# Altium PCB RFID_PCB_Antenna.PcbDoc
Units mm, origin at the board's own origin, x right, y up, seen from the top; angles counter-clockwise.
Board outline 45.7 x 47.45 mm, 2 copper layers (Top Layer, Bottom Layer), stack 1.58 mm thick; 65 components, 38 nets, 190 pads, 57 vias.
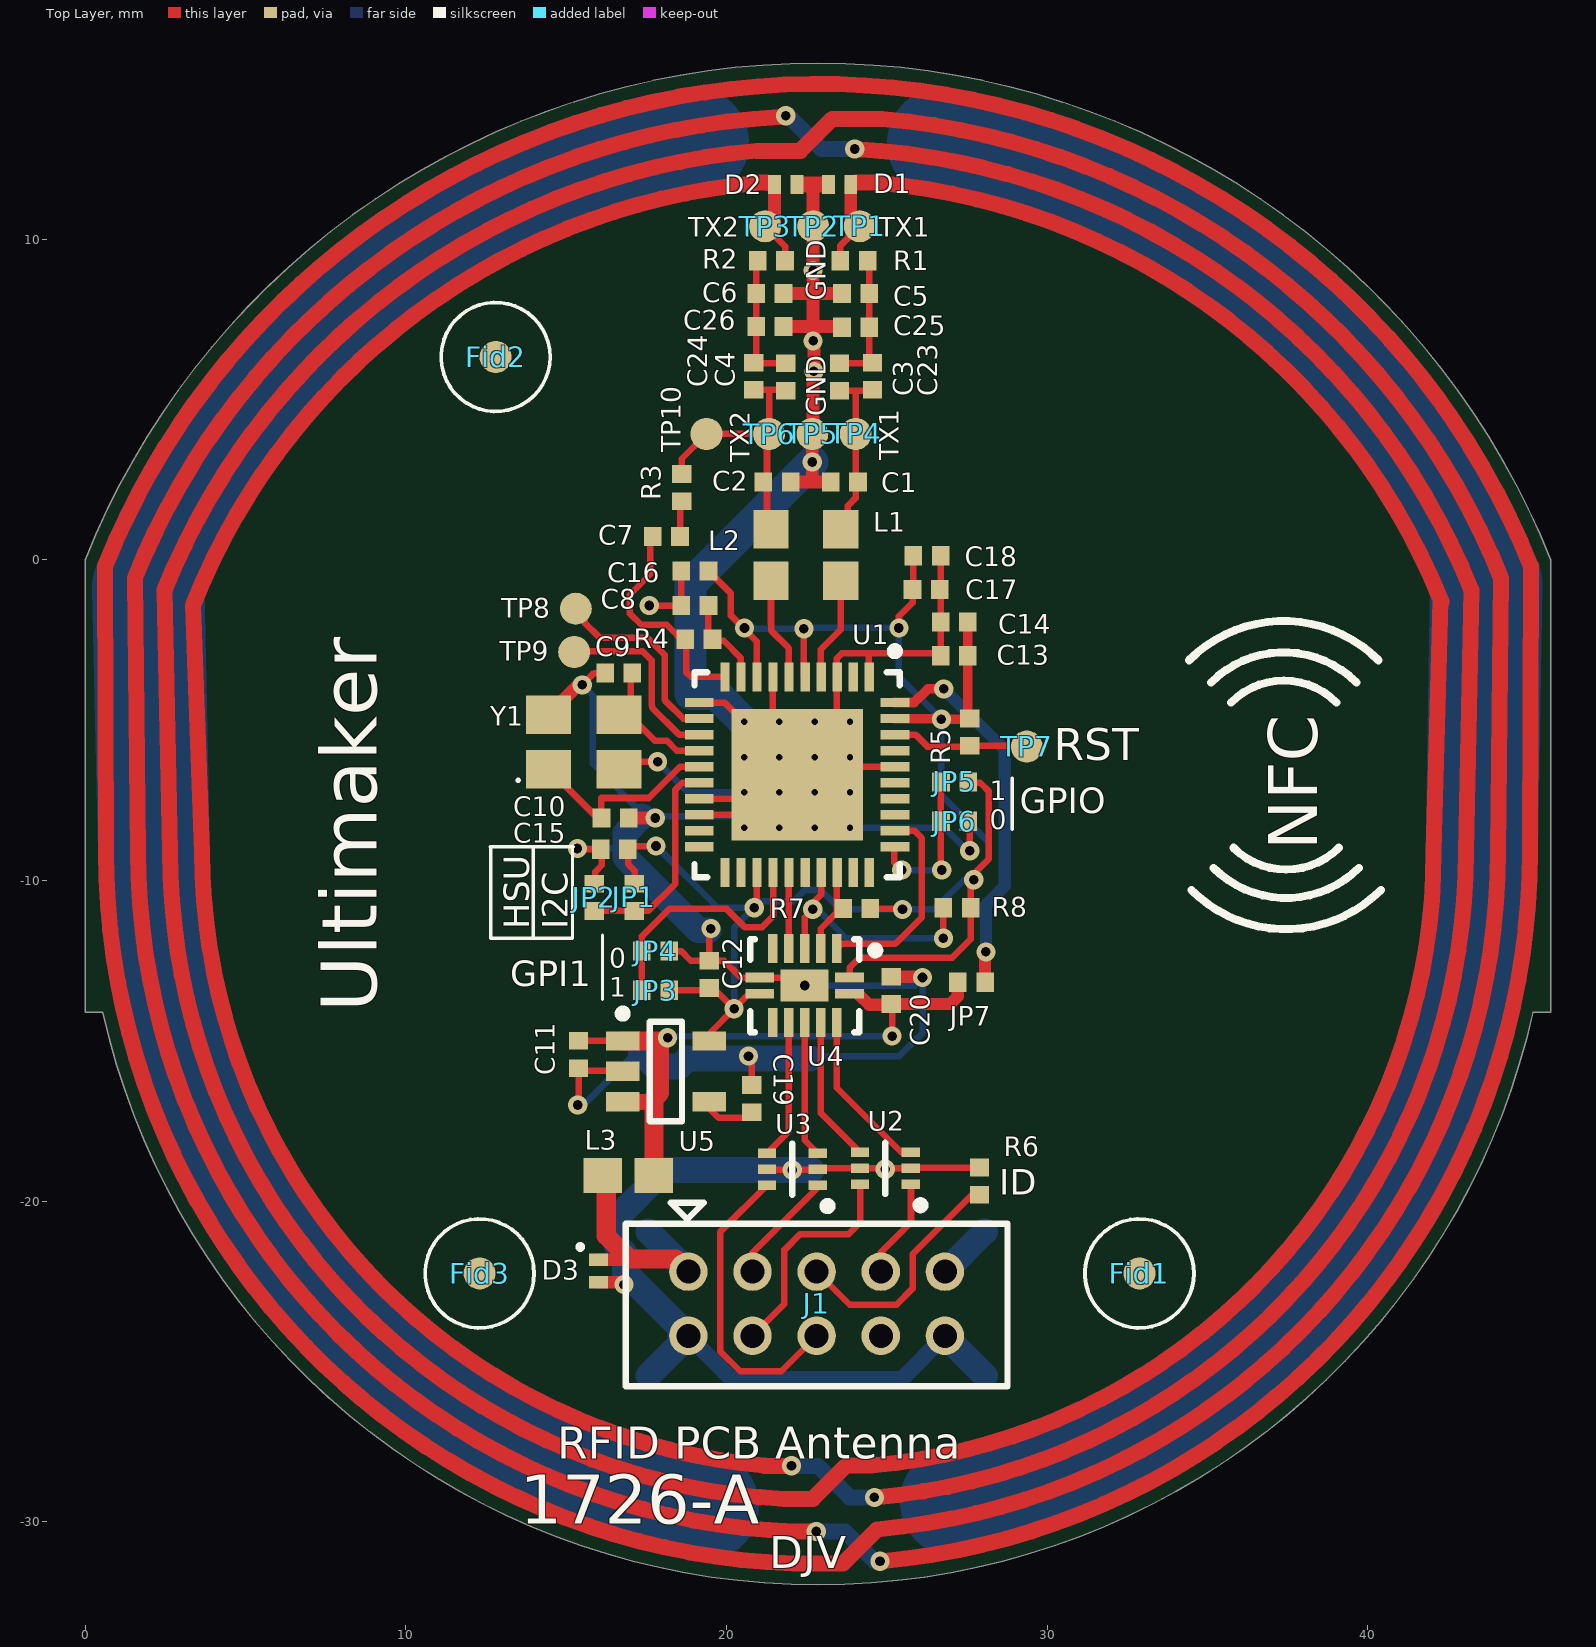
[diagram p0: Top Layer view]
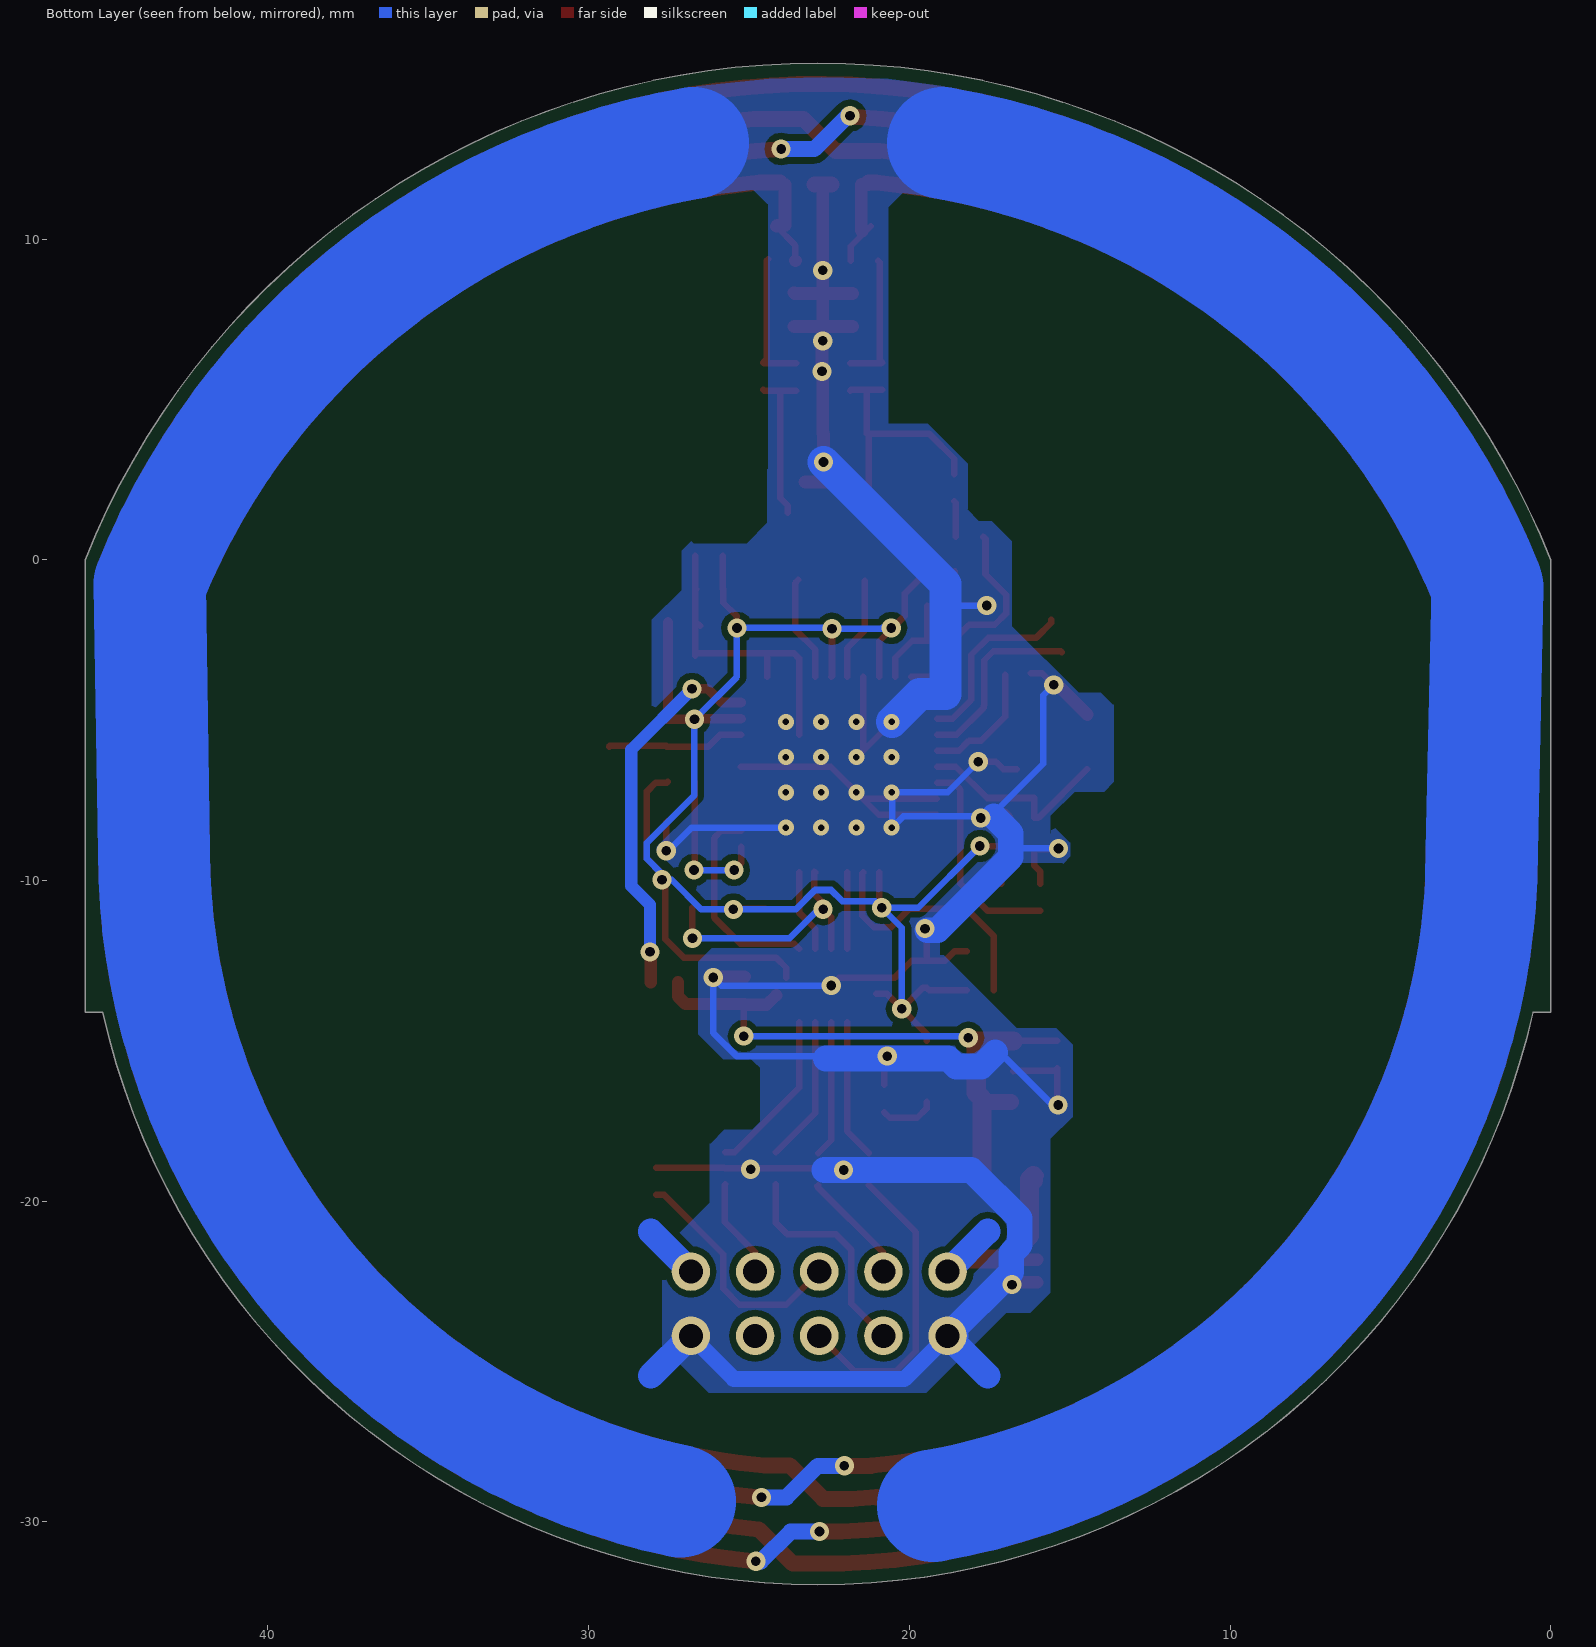
[diagram p1: Bottom Layer view, seen from below]

## Layer stack, top to bottom
Top Solder: solder mask 0.0102, Solder Resist, Dk 3.5
Top Layer: signal copper 0.0356
Dielectric 1: dielectric 1.5086, FR-4, Dk 4.8
Bottom Layer: signal copper 0.0356
Bottom Solder: solder mask 0.0102, Solder Resist, Dk 3.5

## Board outline
0,-14.112 0,0 cw(c22.85,-9.112) 45.7,0 45.7,-14.112 45.146,-14.112 cw(c22.85,-9.112) 0.554,-14.112

## Design rules (kind name [scope] priority, off if disabled: settings)
Clearance Clearance_Board_Outline [InPolygon vs OnLayer('Keep-Out Layer')] p1: gap=0.4 ignorepadtopadclearanceinfootprint=FALSE except(0: Arc-Hole Track-Hole SMDPad-Hole THPad-Hole Via-Hole Fill-Hole Poly-Hole Region-Hole Text-Hole)
Clearance Clearance_U1 [InComponent('U1')] p2: gap=0.178 ignorepadtopadclearanceinfootprint=FALSE except(0: Arc-Hole Track-Hole SMDPad-Hole THPad-Hole Via-Hole Fill-Hole Poly-Hole Region-Hole Text-Hole)
Clearance Clearance_U6 [InComponent('U6')] p3: gap=0.178 ignorepadtopadclearanceinfootprint=FALSE except(0: Arc-Hole Track-Hole SMDPad-Hole THPad-Hole Via-Hole Fill-Hole Poly-Hole Region-Hole Text-Hole)
Clearance Clearance_U3,4,5 [InComponent('U3') or InComponent('U4') or InComponent('U5') or InComponent('U14') or InComponent('U16')] p4: gap=0.178 ignorepadtopadclearanceinfootprint=FALSE except(0: Arc-Hole Track-Hole SMDPad-Hole THPad-Hole Via-Hole Fill-Hole Poly-Hole Region-Hole Text-Hole)
Clearance [All] p5: gap=0.2 ignorepadtopadclearanceinfootprint=FALSE except(0: Arc-Hole Track-Hole SMDPad-Hole THPad-Hole Via-Hole Fill-Hole Poly-Hole Region-Hole Text-Hole)
HoleSize [All] p1: absolutevalues=TRUE maxlimit=4.3 minlimit=0.025 maxpercent=80.000 minpercent=20.000
MinimumSolderMaskSliver [All] p1 off: minsoldermaskwidth=0.051
NetAntennae NetAntennae_GND [InNet('GND')] p1: netantennaetolerance=100
NetAntennae NetAntennae_TX2 [InNet('TX2')] p2: netantennaetolerance=275
NetAntennae NetAntennae_TX1 [InNet('TX1')] p3: netantennaetolerance=275
PlaneClearance [All] p1: clearance=0.203
PlaneConnect [All] p1: planeconnectstyle=Relief reliefexpansion=0.203 reliefentries=4 reliefconductorwidth=0.203 reliefairgap=0.203
PolygonConnect Via [All vs IsVia] p1: connectstyle=Direct reliefconductorwidth=0.254 reliefentries=4 polygonreliefangle="90 Angle" airgapwidth=0.254
PolygonConnect [All] p2: connectstyle=Direct reliefconductorwidth=0.254 reliefentries=4 polygonreliefangle="90 Angle" airgapwidth=0.254
RoomDefinition RFID_PCB_Antenna_1726-A_part_2 [InComponentClass('RFID_PCB_Antenna_1726-A_part_2')] p1 off: confinementstyle=ConfineIn formatcopy=TRUE lockcomponents=FALSE outline 70,13.575 87.35,13.575 87.35,18.15 70,18.15
RoutingVias [All] p1: holewidth=0.3 width=0.6 viastyle="Through Hole" minholewidth=0.3 minwidth=0.6 maxholewidth=1 maxwidth=3
ShortCircuit ShortCircuit_TX1 [InNet('TX1') vs InNet('GND')] p1: allowed=TRUE
ShortCircuit ShortCircuit_TX [InNet('TX1') vs InNet('TX2')] p2: allowed=TRUE
ShortCircuit ShortCircuit_TX2 [InNet('TX2') vs InNet('GND')] p3: allowed=TRUE
SilkToSilkClearance [All] p1: silktosilkclearance=0
SilkToSolderMaskClearance SilkscreenOverComponentPads [IsPad] p1: minsilkscreentomaskgap=0.127 clearancetoexposedcopper=TRUE
SolderMaskExpansion [All] p1: expansion=0.102
Width [All] p1: maxlimit=10 minlimit=0.203 preferedwidth=0.203
22 further rules are at their usual default settings.

## Classes and differential pairs
component class RFID_PCB_Antenna_1726-A_part_1: C1 C2 C3 C4 C5 C6 C7 C8 C9 C10 C23 C24 C25 C26 D1 D2 JP1 JP2 JP3 JP4 JP5 JP6 L1 L2 R1 R2 R3 R4 R5 TP1 TP2 TP3 TP4 TP5 TP6 TP7 TP8 TP9 TP10 U1 Y1
component class RFID_PCB_Antenna_1726-A_part_2: C11 C12 C13 C14 C15 C16 C17 C18 C19 C20 D3 Fid1 Fid2 Fid3 J1 JP7 L3 R6 R7 R8 U2 U3 U4 U5

## Components (designator, comment, footprint, x,y, rotation, side; value= is the part's Value field where it differs from the comment)
C1 "220pF" cap0402 23.675,2.425 r0 top
C2 "220pF" cap0402 21.575,2.425 r0 top
C3 "TBD" cap0402 23.525,5.7 r90 top
C4 "TBD" cap0402 21.85,5.7 r90 top
C5 "TBD" cap0402 24.025,8.3 r0 top
C6 "TBD" cap0402 21.35,8.3 r0 top
C7 "1nF" cap0402 18.125,0.725 r0 top
C8 "100nF" cap0402 19.012,-1.425 r0 top
C9 "33pF" cap0402 16.639,-3.532 r0 top
C10 "33pF" cap0402 16.525,-8.05 r180 top
C11 "100nF" cap0402 15.387,-15.425 r90 top
C12 "2.2uF" cap0402 19.462,-12.925 r270 top
C13 "4.7uF" cap0402 27.1,-2.988 r0 top
C14 "100nF" cap0402 27.1,-1.938 r0 top
C15 "100nF" cap0402 16.5,-9.025 r0 top
C16 "100nF" cap0402 19.012,-0.35 r0 top
C17 "4.7uF" cap0402 26.225,-0.925 r180 top
C18 "100nF" cap0402 26.25,0.125 r180 top
C19 "10nF" cap0402 20.787,-16.8 r90 top
C20 "10nF" cap0402 25.137,-13.425 r270 top
C23 "TBD" cap0402 24.55,5.725 r90 top
C24 "TBD" cap0402 20.85,5.725 r90 top
C25 "TBD" cap0402 24.025,7.25 r0 top
C26 "TBD" cap0402 21.35,7.275 r0 top
D1 "PESD24VF1BL" DFN65P100X50-2N 23.525,11.7 r0 top
D2 "PESD24VF1BL" DFN65P100X50-2N 21.85,11.7 r180 top
D3 "PESD5V0S1UL" DFN65P100X50-2N 16.012,-22.175 r270 top
Fid1 "Fiducial" Fiducial#1 32.875,-22.25 r0 top
Fid2 "Fiducial" Fiducial#2 12.8,6.325 r0 top
Fid3 "Fiducial" Fiducial#2 12.3,-22.25 r0 top
J1 "HEADER 10" HEADER-2X5P-ST-2 16.885,-25.746 r0 top
JP1 "SOLDER JUMPER" "Jumper Solder 0402" 17.125,-10.525 r90 top
JP2 "SOLDER JUMPER" "Jumper Solder 0402" 15.875,-10.525 r270 top
JP3 "SOLDER JUMPER" "Jumper Solder 0402" 17.787,-13.425 r0 top
JP4 "SOLDER JUMPER" "Jumper Solder 0402" 17.787,-12.2 r180 top
JP5 "SOLDER JUMPER" "Jumper Solder 0402" 27.112,-6.925 r0 top
JP6 "SOLDER JUMPER" "Jumper Solder 0402" 27.112,-8.15 r180 top
JP7 "SOLDER JUMPER" "Jumper Solder 0402" 27.637,-13.175 r0 top
L1 "560nH" C0603 23.562,0.15 r90 top
L2 "560nH" C0603 21.387,0.15 r90 top
L3 "120E @ 100MHz" R0603 16.937,-19.2 r0 top
R1 "TBD" RESC1105X04N 23.975,9.325 r180 top
R2 "TBD" RESC1105X04N 21.4,9.325 r0 top
R3 "2.7k" RESC1105X04N 18.6,2.25 r270 top
R4 "1k" RESC1105X04N 19.137,-2.475 r180 top
R5 "1k" RESC1105X04N 27.587,-5.375 r90 top
R6 "TBD" RESC1105X04N 27.887,-19.375 r270 top
R7 "1.5k" RESC1105X04N 24.062,-10.875 r0 top
R8 "1.5k" RESC1105X04N 27.187,-10.85 r0 top
TP1 "Testpoint" Testpoint 24.15,10.4 r0 top
TP2 "Testpoint" Testpoint 22.7,10.4 r90 top
TP3 "Testpoint" TESTPOINT 21.2,10.4 r90 top
TP4 "Testpoint" TESTPOINT 24.025,3.925 r0 top
TP5 "Testpoint" TESTPOINT 22.675,3.925 r0 top
TP6 "Testpoint" Testpoint 21.325,3.925 r0 top
TP7 "Testpoint" TESTPOINT 29.362,-5.825 r90 top
TP8 "Testpoint" Testpoint 15.3,-1.525 r90 top
TP9 "Testpoint" Testpoint 15.25,-2.875 r90 top
TP10 "Testpoint" Testpoint 19.375,3.925 r90 top
U1 "PN532" QFN50P600X600X100_HS-41N 22.2,-6.7 r270 top
U2 "NUF2230" SOTFL50P160X60-6N 24.95,-18.975 r180 top
U3 "NUF2230" SOTFL50P160X60-6N 22.05,-19 r180 top
U4 "NTS0104" QFN50P300X250X100_HS-15N 22.437,-13.275 r180 top
U5 "TPS73033DBVR" SOT95P280X145-5N 18.112,-15.95 r0 top
Y1 "27.12MHz" DFN170P250X71-4N 15.55,-5.675 r0 top

## Footprints (in the part's own frame and the unit in brackets; to place one, negate y for a bottom-side part, rotate by r counter-clockwise, add the part's x,y. Pads: shape width x height; smd on the part's side, far side on the other; paste and mask are expansions set on the pad)
C0603 [mm]
  rect 1.2x1.1 smd mask+0.102: 1(-0.8,0) 2(0.8,0)
  body extent -0.8,-0.4 0.8,0.4, height 0.9
cap0402 [mm] "0402"
  rect 0.55x0.6 smd: 1(-0.425,0) 2(0.425,0)
  body extent -0.55,-0.3 0.55,0.3, height 0.4
DFN65P100X50-2N [mm] "DFN, 2-Leads, Body 0,60x1,00mm, Pitch 0,65mm, IPC Medium Density"
  rect 0.4x0.6 smd: 1(-0.35,0) 2(0.35,0)
  body extent -0.53,-0.33 0.53,0.33, height 0.5
DFN170P250X71-4N [mm] "DFN, 4-Leads, Body 3,20x2,50mm, Pitch 1,70mm, IPC Medium Density"
  rect 1.4x1.2 smd: 1(-1.1,-0.85) 2(-1.1,0.85) 2(1.1,-0.85) 3(1.1,0.85)
  silkscreen extent -2.09,-1.24 -2.01,-1.16, body extent -1.6,-1.2 1.6,1.3, height 0.71
Fiducial#1 [mm] "Fiducial"
  round 1 smd paste-1.5 mask+1: ""(0,0)
  silkscreen extent -1.7,-1.7 1.7,1.7
Fiducial#2 [mm] "Fiducial"
  round 1 smd paste-1 mask+1: ""(0,0)
  silkscreen extent -1.7,-1.7 1.7,1.7
HEADER-2X5P-ST-2 [mm] "B10B-PHDSS(LF)(SN)"
  round 1.2 hole 0.75: 1(1.925,3.55) 2(1.925,1.55) 3(3.925,3.55) 4(3.925,1.55) 5(5.925,3.55) 6(5.925,1.55) 7(7.925,3.55) 8(7.925,1.55) 9(9.925,3.55) 10(9.925,1.55)
  Bottom Layer lines w0.8: 0.675,0.3 1.925,1.55 ; 0.675,4.8 1.925,3.55 ; 9.925,1.55 11.175,0.3 ; 9.925,3.55 11.175,4.8
  silkscreen extent -0.03,-0.03 11.88,5.7, body extent 0,0.05 11.9,5.05, height 6.5
"Jumper Solder 0402" [mm] "Jumper 2 Solder size 0402"
  rect 0.55x0.6 smd: 1(-0.425,0) 2(0.425,0)
QFN50P300X250X100_HS-15N [mm] "QFN, 14-Leads, Body 3,00x2,50mm, Pitch 0,50mm, Thermal Pad 1,50x1,00mm, IPC Medium Density"
  rect 0.9x0.3 smd: 1(-1.4,-0.25) 7(1.4,-0.25) 8(1.4,0.25) 14(-1.4,0.25)
  rect 0.3x0.9 smd: 2(-1,-1.15) 3(-0.5,-1.15) 4(0,-1.15) 5(0.5,-1.15) 6(1,-1.15) 9(1,1.15) 10(0.5,1.15) 11(0,1.15) 12(-0.5,1.15) 13(-1,1.15)
  rect 1.5x1 smd: 7(0,0)
  silkscreen extent -2.33,-1.45 1.7,1.45, body extent -1.55,-1.3 1.55,1.3, height 1
QFN50P600X600X100_HS-41N [mm] "QFN, 40-Leads, Body 6,00x6,00mm, Pitch 0,50mm, Thermal Pad 4,10x4,10mm, IPC Medium Density"
  rect 0.9x0.29 smd: 1(-3.05,2.25) 2(-3.05,1.75) 3(-3.05,1.25) 4(-3.05,0.75) 5(-3.05,0.25) 6(-3.05,-0.25) 7(-3.05,-0.75) 8(-3.05,-1.25) 9(-3.05,-1.75) 10(-3.05,-2.25) 21(3.05,-2.25) 22(3.05,-1.75) 23(3.05,-1.25) 24(3.05,-0.75) 25(3.05,-0.25) 26(3.05,0.25) 27(3.05,0.75) 28(3.05,1.25) 29(3.05,1.75) 30(3.05,2.25)
  rect 0.29x0.9 smd: 11(-2.25,-3.05) 12(-1.75,-3.05) 13(-1.25,-3.05) 14(-0.75,-3.05) 15(-0.25,-3.05) 16(0.25,-3.05) 17(0.75,-3.05) 18(1.25,-3.05) 19(1.75,-3.05) 20(2.25,-3.05) 31(2.25,3.05) 32(1.75,3.05) 33(1.25,3.05) 34(0.75,3.05) 35(0.25,3.05) 36(-0.25,3.05) 37(-0.75,3.05) 38(-1.25,3.05) 39(-1.75,3.05) 40(-2.25,3.05)
  rect 4.1x4.1 smd: 41(0,0)
  silkscreen extent -3.97,-3.2 3.2,3.2, body extent -3.05,-3.05 3.05,3.05, height 1
R0603 [mm] "hip Resistor, 2-Leads, Body 1.55x0.85mm, IPC Medium Density"
  rect 1.2x1.1 smd mask+0.102: 1(-0.8,0) 2(0.8,0)
  body extent -0.77,-0.42 0.78,0.43, height 0.45
RESC1105X04N [mm] "Chip Resistor 0402, 2-Leads, Body 1,05x0,54mm, IPC Medium Density"
  rect 0.55x0.6 smd: 1(-0.425,0) 2(0.425,0)
  body extent -0.55,-0.3 0.55,0.3, height 0.4
SOT95P280X145-5N [mm] "SOT23, 5-Leads, Body 2,90x2,80mm, Pitch 0,95mm, IPC Medium Density"
  rect 1.05x0.6 smd: 1(-1.35,0.95) 2(-1.35,0) 3(-1.35,-0.95) 4(1.35,-0.95) 5(1.35,0.95)
  silkscreen extent -1.47,-1.55 0.5,1.92, body extent -0.87,-1.52 0.87,1.53, height 1.45
SOTFL50P160X60-6N [mm]
  rect 0.57x0.3 smd: 1(-0.79,0.5) 2(-0.79,0) 3(-0.79,-0.5) 4(0.79,-0.5) 5(0.79,0) 6(0.79,0.5)
  silkscreen extent -1.23,-0.8 0,1.27
Testpoint [mm]
  round 1 smd paste-2 mask+0: 1(0,0)
TESTPOINT [mm]
  round 1 smd paste-2 mask+0: 1(0,0)

## Part data
C1 C2 C3 C4 C5 C6 C7 C8 C9 C10 C11 C12 C13 C14 C15 C16 C17 C18 C19 C20 C23 C24 C25 C26: library part C0402, "C0402"
D1 D2: library part "Biploar TVS Diode", "TVS DIODE 24VWM 17VC DFN1006-2"
D3: library part "TVS Diode", "TVS DIODE 5VWM 20VC SOD882"
J1: "B10B-PHDSS(LF)(SN)"
JP7: library part "JUMPER 2 SOLDER"
L1 L2: "Murata LQW18CNR56J00D 560nH 5%"
L3: "FERRIET BLM18PG121SN1D 0603 MURATA"
R1 R2 R3 R4 R5 R6 R7 R8: library part R0402, "R0402"
TP7: library part "Testpoint 1mm"
U1: "PN5321A3HN"
U2 U3: "NUF2230XV6T1G"
U4: "NTS0104GU12,115"
U5: "LDO 3.3V"
Y1: library part XTAL-3, "7M-27.120MAAJ-T"

## Via types
v1: diameter 0.6, hole 0.3, Top Layer to Bottom Layer, tented both sides, 41 vias
v2: diameter 0.5, hole 0.2, Top Layer to Bottom Layer, tented bottom, 16 vias

## Nets (pads, with @x,y where several pads share a name; then routed paths per layer and width w, separated by ;. In a path a pad name is that pad's centre, name@x,y a point inside that pad or via, vN(x,y) a via of type N, cw(c..) or ccw(c..) an arc to the next point about the centre after c; other vN are vias at no path point)
+5V: D3.1 J1.1 L3.1 | length 7.8
  Top Layer w0.381: L3.1@15.987,-19.2 16.137,-19.35 L3.1@16.162,-19.375
  Top Layer w0.4: D3.1 18.389,-21.825 J1.1@18.414,-21.8
  Top Layer w0.6: L3.1@16.137,-19.35 L3.1 16.25,-19.313 16.25,-21.075 16.975,-21.8 18.414,-21.8 J1.1
AVDD: C12.2 C13.2 C14.2 C15.2 C16.2 C17.2 C18.2 JP1.2 JP3.2 JP5.2 R5.2 R7.2 R8.2 U1.5 U1.8 U1.23 U1.39 U4.1 U4.8 U5.5 | length 61.3
  Top Layer w0.203: JP1.2@17.137,-10.1 17.137,-9.7 16.937,-9.5 16.937,-8.975 17.014,-8.897 17.042,-8.925 v1(17.8,-8.925) ; JP3.2 19.387,-13.425 C12.2 19.587,-13.35 v1(20.237,-14) ; C16.2 20.137,-1.05 20.137,-1.737 20.937,-2.537 U1.8@20.937,-3.65 ; U5.5 19.462,-14.775 v1(20.237,-14) ; v1(20.862,-10.85) 20.937,-10.775 U1.23@20.937,-9.75 ; U4.8 20.712,-13.525 v1(20.237,-14) ; v1(22.412,-2.15) 22.412,-3.625 U1.5@22.437,-3.65 ; U4.1 23.837,-12.72 24.155,-12.401 27.036,-12.401 27.612,-11.826 R8.2 27.612,-10.075 v1(27.712,-9.975) 27.712,-9.794 28.182,-9.324 28.182,-7.22 27.912,-6.95 27.562,-6.95 JP5.2 ; R7.2 25.462,-10.875 v1(25.487,-10.9) ; v1(25.375,-2.125) 25.375,-1.761 25.8,-1.336 C17.2 25.825,-0.9 C18.2 ; R5.2@27.525,-4.888 R5.2 ; C14.2 C14.2@27.525,-1.887
  Top Layer w0.3: U1.39@25.237,-4.95 26.675,-4.95 v1(26.7,-4.975) 27.561,-4.975 R5.2 ; R5.2@27.525,-4.888 C13.2 C14.2
  Bottom Layer w0.203: v1(17.8,-8.925) 19.725,-10.85 v1(20.862,-10.85) ; v1(20.237,-14) 20.237,-11.475 21.064,-10.648 22.088,-10.648 22.44,-10.296 22.938,-10.296 23.543,-10.9 v1(25.487,-10.9) 26.487,-10.9 27.412,-9.975 v1(27.712,-9.975) 27.712,-9.794 28.182,-9.324 28.182,-8.826 26.7,-7.344 v1(26.7,-4.975) 25.375,-3.65 v1(25.375,-2.125) 22.436,-2.125 v1(22.412,-2.15) 20.867,-2.15 20.842,-2.125 v1(20.562,-2.125)
GND: C1.1 C2.2 C5.1 C6.2 C8.1 C9.1 C10.1 C11.1 C12.1 C13.1 C14.1 C15.1 C16.1 C17.1 C18.1 C19.2 C20.1 C25.1 C26.2 D1.1 D2.1 D3.2 J1.2 J1.10 JP2.1 JP4.1 JP6.1 R6.1 TP2.1 TP5.1 U1.1 U1.3 U1.7 U1.11 U1.17 U1.18 U1.36 U1.41 U2.2 U2.5 U3.2 U3.5 U4.7 U5.2 Y1.2 | length 259.2
  Top Layer w0.203: v1(15.35,-9) 15.375,-9.025 C15.1 ; v1(15.362,-17) 15.387,-16.975 C11.1 ; v1@15.375,-3.9 v1(15.5,-3.9) 15.868,-3.532 C9.1 ; C11.1@15.437,-15.925 16.737,-15.925 U5.2 ; JP2.1@15.912,-10.1 15.912,-9.725 16.112,-9.525 C15.1@16.112,-9 ; v1@16.644,-22.525 v1@16.719,-22.6 ; Y1.2@16.65,-6.525 17.075,-6.525 17.3,-6.3 v1(17.85,-6.3) ; v1(17.587,-1.425) C8.1 C16.1 ; JP4.1 18.587,-12.2 18.887,-12.5 C12.1 ; U1.11@19.137,-4.45 19.937,-4.45 21.437,-5.95 U1.7@21.437,-3.65 ; U1.18 20.95,-7.95 U1.41@21.45,-7.45 ; U1.17 U1.41@21.45,-7.45 ; v1(19.512,-11.5) 19.462,-11.55 C12.1 ; v1(20.687,-15.475) 20.787,-15.575 C19.2 ; U3.5 21.285,-19.025 v1(22.05,-19.025) 22.815,-19.025 U3.2 22.865,-18.975 U2.5 U2.2 25.765,-18.95 R6.1 ; v1(22.437,-13.275) 22.187,-13.025 21.037,-13.025 20.45,-13.025 19.925,-12.5 C12.1 ; U1.41@23.437,-5.45 23.437,-3.075 23.591,-2.92 24.416,-2.92 24.437,-2.941 ; U1.1@24.437,-3.65 24.437,-2.941 ; U1.36 22.45,-6.45 U1.41 v2(21.65,-7.25) U1.41@21.45,-7.45 ; v1@26.087,-13 v1(26.112,-13.025) ; C14.1@26.525,-2.063 C14.1@26.675,-1.913 ; C13.1 26.607,-2.92 24.457,-2.92 24.437,-2.941 ; C13.1@26.675,-2.963 C14.1 C14.1@26.675,-1.913 ; C18.1 26.675,-0.9 C17.1 26.675,-0.95 C14.1@26.675,-1.913 ; JP6.1 27.587,-8.2 27.58,-8.206 v1(27.58,-9.075)
  Top Layer w0.4: Y1.2@14.45,-4.825 v1@15.375,-3.9 ; D3.2 v1@16.644,-22.525 ; v1@16.719,-22.6 v1(16.8,-22.6) ; C10.1 17.05,-7.95 17.15,-8.05 v1(17.775,-8.05) ; C26.2 22.7,7.275 ; C6.2 22.7,8.3 ; C2.2 22.55,2.425 ; 22.675,11.7 22.7,11.675 TP2.1 v1(22.7,9.025) 22.7,8.3 ; v1@22.7,5.875 22.7,3.95 TP5.1 v1(22.675,3.05) 22.675,2.55 22.55,2.425 ; v1(22.725,5.875) 22.725,6.8 v1(22.7,6.825) 22.7,7.275 ; C1.1 22.55,2.425 ; C25.1@23.6,7.275 22.7,7.275 ; C5.1@23.6,8.325 23.575,8.3 22.7,8.3 ; C20.1 v1@26.087,-13 ; 22.7,7.275 22.7,8.3
  Top Layer w0.5: 22.425,11.7 22.675,11.7 22.95,11.7
  Top Layer w0.8: J1.10 J1.10@26.871,-24.196
  Bottom Layer w0.203: v1(15.35,-9) 16.569,-9 16.839,-9.27 ; v1(15.362,-17) 15.539,-17 17.175,-15.363 17.325,-15.363 ; v1(15.5,-3.9) 15.825,-4.225 15.825,-6.362 17.46,-7.997 ; v1(17.587,-1.425) 18.825,-1.425 18.875,-1.375 ; v1@17.775,-7.997 20.184,-7.997 20.537,-8.35 20.537,-7.25 18.8,-7.25 v1(17.85,-6.3) ; 21.6,-15.475 25.387,-15.475 26.112,-14.751 v1(26.112,-13.025) 25.862,-13.275 v1(22.437,-13.275) ; v2@23.837,-8.35 26.787,-8.35 27.512,-9.075 v1(27.58,-9.075)
  Bottom Layer w0.5: J1.2 20.164,-25.55 25.475,-25.55 25.475,-25.53 J1.10 ; 18.875,-4.188 18.875,-3.994
  Bottom Layer w0.8: 17.325,-15.363 17.762,-15.8 18.534,-15.8 18.783,-15.551 22.601,-15.551 ; 17.366,-7.997 16.839,-8.524 16.839,-9.27 19.121,-11.551 v1@19.437,-11.551 ; J1.2@18.554,-24.196 J1.2 16.825,-22.211 16.825,-21.625 16.56,-21.36 16.56,-20.532 18.066,-19.025 v1(22.05,-19.025) 22.65,-19.025
  Bottom Layer w1: 18.875,-4.188 19.675,-4.188 v2@20.537,-5.05 ; 18.875,-3.994 18.875,-1.375 18.875,-0.75 v1(22.675,3.05)
  Bottom Layer w3.5: 1.969,-0.866 2.15,-9.112 ccw(c22.85,-9.112) 19.255,-29.498 ; 2.014,-0.755 cw(c22.85,-9.112) 18.952,12.997 ; 26.748,12.997 cw(c22.85,-9.112) 43.686,-0.755 43.55,-9.112 cw(c22.85,-9.112) 27.154,-29.36
  other v1: 24.95,-19
  other v2: 20.55,-8.35 21.65,-8.35 22.75,-8.35 23.85,-8.35 20.55,-7.25 22.75,-7.25 23.85,-7.25 20.55,-6.15 21.65,-6.15 22.75,-6.15 23.85,-6.15 20.55,-5.05 21.65,-5.05 22.75,-5.05 23.85,-5.05
GPI0: JP5.1 JP6.2 U1.31 | length 4.8
  Top Layer w0.203: U1.31@25.237,-8.95 25.237,-9.444 v1(25.464,-9.672) ; JP5.1 JP6.2 26.687,-9.644 v1(26.714,-9.672)
  Bottom Layer w0.203: v1(25.464,-9.672) v1(26.714,-9.672)
GPI1: JP3.1 JP4.2 U1.24 | length 7.9
  Top Layer w0.203: JP3.1 JP4.2 17.362,-11.74 18.227,-10.875 19.987,-10.875 20.563,-11.451 21.111,-11.451 21.463,-11.099 21.463,-9.776 U1.24@21.437,-9.75
H_REQ: U2.3 U4.13 | length 5.2
  Top Layer w0.203: U4.13 23.437,-16.462 25.45,-18.475 U2.3
H_REQ_3V3: U1.32 U4.2 | length 6.5
  Top Layer w0.203: U4.2 23.591,-11.97 25.267,-11.97 26.088,-11.149 26.088,-8.676 25.862,-8.45 U1.32@25.237,-8.45
H_REQ_5: J1.7 U2.1 | length 3.1
  Top Layer w0.203: J1.7 24.81,-21.596 25.752,-20.654 25.752,-19.487 U2.1
"I2C / HSU": JP1.1 JP2.2 U1.16 | length 6.6
  Top Layer w0.203: JP2.2@15.912,-10.95 17.555,-10.95 18.407,-10.098 18.407,-7.164 18.621,-6.95 U1.16@19.137,-6.95
"ID RES": J1.5 R6.2 | length 7.9
  Top Layer w0.203: J1.5@23.059,-21.947 J1.5 23.839,-23.225 25.3,-23.225 25.8,-22.725 25.8,-21.65 27.65,-19.8 R6.2
IRQ: U3.4 U4.10 | length 4.4
  Top Layer w0.203: U3.4 21.937,-17.823 U4.10
IRQ_3V3: U1.25 U4.5 | length 2.4
  Top Layer w0.203: U4.5 U1.25@21.937,-9.75
IRQ_5: J1.6 U3.6 | length 9.5
  Top Layer w0.203: U3.6 19.8,-20.96 19.8,-24.675 20.425,-25.3 21.705,-25.3 J1.6
NetC1_2: C1.2 C3.1 C23.1 L1.2 TP4.1 | length 4.9
  Top Layer w0.203: C3.1 24,5.275 ; L1.2@23.787,1.475 23.787,1.687 24.025,1.925 TP4.1 24.025,5.25 24,5.275 ; C23.1 24.525,5.275 24,5.275
NetC2_1: C2.1 C4.1 C24.1 L2.2 R3.1 TP6.1 TP10.1 | length 8.4
  Top Layer w0.203: R3.1 18.6,3.15 TP10.1 TP6.1@21.262,3.925 ; C24.1 21.35,5.3 ; L2.2@21.262,1.45 TP6.1@21.262,3.925 ; C4.1 21.825,5.3 21.35,5.3 ; TP6.1@21.262,3.925 TP6.1 21.325,5.275 21.35,5.3
NetC3_2: C3.2 C5.2 C23.2 C25.2 R1.1 | length 4.3
  Top Layer w0.203: C3.2 24.525,6.125 C23.2 24.45,6.25 24.45,9.325 R1.1@24.4,9.375
NetC4_2: C4.2 C6.1 C24.2 C26.1 R2.1 | length 4.2
  Top Layer w0.203: R2.1 20.925,9.275 C6.1 C26.1 20.925,6.225 C24.2 20.875,6.125 C4.2
NetC7_1: C7.1 R4.2 U1.10 | length 7
  Top Layer w0.203: C7.1 17.625,0.65 17.625,-0.45 16.985,-1.09 16.985,-1.674 17.337,-2.026 18.138,-2.026 18.737,-2.625 18.737,-3.5 18.887,-3.65 U1.10@19.937,-3.65
NetC7_2: C7.2 R3.2 | length 1.1
  Top Layer w0.203: C7.2 18.55,1.775 R3.2
NetC8_2: C8.2 R4.1 U1.9 | length 2.8
  Top Layer w0.203: R4.1@19.412,-2.525 19.911,-2.525 20.437,-3.051 U1.9@20.437,-3.65 ; R4.1@19.437,-2.4 C8.2
NetC9_2: C9.2 U1.14 Y1.3 | length 3.9
  Top Layer w0.203: C9.2@17.012,-3.584 17.012,-4.889 17.76,-5.637 18.136,-5.637 18.448,-5.95 U1.14@19.137,-5.95
NetC10_2: C10.2 U1.15 Y1.1 | length 6.3
  Top Layer w0.203: Y1.1 15.975,-8.05 C10.2 16.1,-7.427 17.574,-7.427 18.551,-6.45 U1.15@19.137,-6.45
NetC19_1: C19.1 U5.4 | length 1.7
  Top Layer w0.203: U5.4 19.462,-17.112 19.75,-17.4 20.611,-17.4 C19.1
NetL1_1: L1.1 U1.4 | length 3.3
  Top Layer w0.203: U1.4@22.937,-3.65 22.937,-2.8 23.562,-2.175 23.562,-0.725 L1.1@23.462,-0.625
NetL2_1: L2.1 U1.6 | length 3.2
  Top Layer w0.203: L2.1 21.387,-1.999 21.388,-2.001 21.388,-2.202 21.937,-2.751 U1.6@21.937,-3.65
NetR5_1: R5.1 TP7.1 U1.38 | length 4.3
  Top Layer w0.203: U1.38@25.237,-5.45 25.89,-5.45 26.265,-5.825 27.562,-5.825 R5.1 29.337,-5.8 TP7.1
NetTP8_1: TP8.1 U1.12 | length 5.7
  Top Layer w0.203: TP8.1@15.575,-1.875 15.575,-1.963 16.037,-2.425 17.166,-2.425 17.17,-2.43 17.533,-2.43 18.066,-2.963 18.066,-4.37 18.647,-4.95 U1.12@19.137,-4.95
NetTP9_1: TP9.1 U1.13 | length 5.8
  Top Layer w0.203: TP9.1 15.275,-2.85 17.383,-2.85 17.663,-3.13 17.663,-4.537 17.687,-4.56 17.687,-4.618 18.519,-5.45 U1.13@19.137,-5.45
SCL: U3.3 U4.11 | length 4.2
  Top Layer w0.203: U4.11 22.437,-18.097 U3.3
SCL_3V3: R8.1 U1.27 U4.4 | length 8
  Top Layer w0.203: U4.4 22.437,-11.15 v1(22.689,-10.897) 22.689,-10.697 22.958,-10.429 22.958,-9.729 U1.27@22.937,-9.75 ; v1(26.762,-11.8) R8.1
  Bottom Layer w0.203: v1(22.689,-10.897) 22.833,-10.897 23.736,-11.8 v1(26.762,-11.8)
SCL_5: J1.3 U3.1 | length 3.6
  Top Layer w0.203: J1.3 20.81,-21.604 22.877,-19.537 U3.1
SDA: U2.4 U4.12 | length 4.6
  Top Layer w0.203: U4.12 22.937,-17.252 U2.4
SDA_3V3: R7.1 U1.28 U4.3 | length 2.6
  Top Layer w0.203: U4.3 22.937,-11.5 23.437,-11 U1.28@23.437,-9.75
SDA_5: J1.4 U2.6 | length 7
  Top Layer w0.203: J1.4 21.806,-23.2 21.806,-21.519 22.3,-21.025 23.812,-21.025 24.172,-20.665 24.172,-19.487 U2.6
TX1: D1.2 R1.2 TP1.1 | length 274
  Top Layer w0.203: R1.2 23.55,9.8 TP1.1
  Top Layer w0.4: D1.2 23.875,10.425 24.125,10.425 TP1.1
  Top Layer w0.5: 23.477,14.83 ccw(c22.85,-9.112) 0.621,-0.196 0.65,-9.112 ccw(c22.85,-9.112) 22.075,-31.298 23.631,-31.298 24.698,-30.231 ccw(c22.85,-9.112) 44.05,-9.112 44.151,-0.569 ccw(c22.85,-9.112) 24.85,13.751 23.301,13.751 22.304,12.754 20.937,12.754 ccw(c22.85,-9.112) 2.478,-0.941 2.65,-9.112 ccw(c22.85,-9.112) 21.793,-29.284 22.691,-29.284 23.736,-28.239 24.523,-28.239 ccw(c22.85,-9.112) 42.05,-9.112 42.268,-1.249 ; D1.2@24.033,11.758 24.676,11.758 cw(c22.85,-9.112) 42.294,-1.313
TX2: D2.2 R2.2 TP3.1 | length 271.9
  Top Layer w0.203: TP3.1 21.825,9.775 R2.2
  Top Layer w0.4: TP3.1@21.475,10.246 21.5,10.271 D2.2
  Top Layer w0.5: 21.275,11.75 21.267,11.758 21.024,11.758 ccw(c22.85,-9.112) 3.364,-1.417 3.65,-9.112 ccw(c22.85,-9.112) 21.177,-28.239 21.188,-28.25 v1(22.025,-28.25) ; v1@21.649,13.807 ccw(c22.85,-9.112) 1.549,-0.569 1.65,-9.112 ccw(c22.85,-9.112) 22.11,-30.299 v1(22.801,-30.299) ; 23.477,14.83 cw(c22.85,-9.112) 45.079,-0.196 45.05,-9.112 cw(c22.85,-9.112) v1(24.785,-31.228) ; v1(23.999,12.808) cw(c22.85,-9.112) 43.222,-0.941 43.05,-9.112 cw(c22.85,-9.112) v1(24.611,-29.235)
  Bottom Layer w0.5: v1(21.85,13.85) 21.925,13.85 22.967,12.808 v1(23.999,12.808) ; v1(22.025,-28.25) 22.85,-28.25 23.835,-29.235 v1(24.611,-29.235) ; v1(22.801,-30.299) 23.7,-30.299 24.628,-31.228 v1(24.785,-31.228)
VBAT: JP7.2 U1.40 | length 11.9
  Top Layer w0.3: U1.40@25.237,-4.45 25.85,-4.45 26.275,-4.025 v1(26.775,-4.025)
  Top Layer w0.381: JP7.2 28.062,-12.25 v1(28.087,-12.225)
  Bottom Layer w0.381: v1(26.775,-4.025) 28.674,-5.924 28.674,-10.167 28.087,-10.754 v1(28.087,-12.225)
VCC_5V: C11.2 C20.2 JP7.1 L3.2 U4.14 U5.1 U5.3 | length 19.4
  Top Layer w0.203: C11.2 U5.1 ; C20.2 25.162,-13.875 v1(25.162,-14.85)
  Top Layer w0.381: U4.14@24.15,-13.575 24.45,-13.875 25.111,-13.875 C20.2 26.975,-13.85 27.212,-13.613 JP7.1
  Top Layer w0.5: U5.3@16.837,-16.9 17.687,-16.9
  Top Layer w0.6: U5.1 17.912,-15 17.912,-16.625 17.737,-16.8 L3.2
  Bottom Layer w0.203: v1(18.162,-14.9) 18.212,-14.85 v1(25.162,-14.85)
pads on no net: Fid1. Fid2. Fid3. J1.8 J1.9 U1.2 U1.19 U1.20 U1.21 U1.22 U1.26 U1.29 U1.30 U1.33 U1.34 U1.35 U1.37 U4.6 U4.9

## Polygon pours and split planes (outlines as drawn)
GND on Bottom Layer "GND" (solid, remove dead copper, pour order 34): 26.25,-25.975 26.938,-25.288 27.7,-24.525 27.7,-24.25 27.7,-21.525 26.25,-20.075 26.225,-20.05 26.225,-18.2 26.2,-18.2 25.775,-17.775 24.9,-17.775 24.475,-17.35 24.425,-17.3 24.425,-16 24.5,-16 24.975,-15.525 25.025,-15.575 25.75,-15.575 25.8,-15.575 26.575,-14.8 26.575,-12.65 26.575,-12.525 25.5,-11.45 27.975,-8.975 27.975,-8.525 27.525,-8.525 26.8,-7.8 26.65,-7.95 23.825,-7.95 16.7,-7.95 16.225,-8.425 19.05,-11.25 19.05,-12.325 18.925,-12.325 16.675,-14.575 16.65,-14.6 15.425,-14.6 14.925,-15.1 14.9,-15.125 14.9,-17.375 14.925,-17.375 15.25,-17.7 15.6,-18.05 15.6,-22.775 15.6,-22.85 16.2,-23.45 16.225,-23.475 16.975,-23.475 19.475,-25.975
GND on Bottom Layer "GND" (solid, remove dead copper, pour order 32): 28.025,-7.775 28.025,-1.95 28.025,-1.875 27.1,-0.95 27.1,0.275 26.8,0.575 26.725,0.5 25.125,0.5 25.075,0.5 24.5,1.075 24.425,1.15 24.425,2.825 20.675,2.825 20.65,2.8 18.175,2.8 18.175,1.6 18.2,1.575 17.85,1.225 17.85,1.2 17.425,1.2 17.075,0.85 16.8,0.575 16.8,-2.3 16.8,-2.075 16.825,-2.05 14.725,-4.15 14.65,-4.15 14.025,-4.15 13.65,-4.525 13.625,-4.525 13.625,-6.925 13.925,-7.225 15.05,-7.225 14.85,-7.225 15.6,-7.975 15.6,-8 15.6,-8.525 15.575,-8.55 15.575,-8.35 15.575,-8.25 15.625,-8.2 15,-8.825 14.875,-8.825 14.975,-8.825 15,-8.8 14.975,-8.825 14.975,-9.15 14.975,-9.25 15.2,-9.475 15.225,-9.45 16.5,-9.45 16.725,-9.45 18.85,-11.575
GND on Bottom Layer "GND" (solid, remove dead copper, pour order 30): 18.825,14.75 20.65,15 22.75,15.05 24.375,15 26.725,14.75 26.15,11.4 26.15,11.375 24.35,11.6 23.15,11.6 20.5,11.475 19.3,11.325
GND on Bottom Layer "GND Plane" (solid, remove dead copper, pour order 22): 22.1,-18.6 25.775,-18.6 26.05,-18.875 26.05,-19.125 26.05,-19.175 25.825,-19.4 22.05,-19.4 22.05,-18.65
GND on Bottom Layer "GND Plane2" (solid, remove dead copper, pour order 26): 21.25,-15.138 24.55,-15.138 24.575,-15.162 24.65,-15.238 24.65,-17.488 24.65,-17.788 25.85,-18.988 22.196,-18.988 22.1,-18.988 22.4,-18.687 22.6,-18.488 22.611,-18.477 22.635,-18.378 22.611,-18.477 22.675,-18.212 22.65,-16.187 22.371,-15.908 22.4,-15.937 21.15,-15.937 20.875,-15.663 20.875,-15.388
GND on Bottom Layer "GND" (solid, remove dead copper, pour order 36): 24.425,2.8 24.4,2.825 24.4,11.1 24.425,11.1 24.975,11.65 24.7,11.925 20,11.925 20,11.65 20.625,11.025 20.65,11 20.65,4.25 19.425,4.25 19.325,4.15 18.175,3 18.175,2.8

## Other copper
Top Layer:
  text "Copper TOP 35u" at 10.45,27.225 h1.52
Bottom Layer:
  text "Copper BOT 35u" at 10.375,27.525 h1.52

## Silkscreen, mask and mechanical layers (free items; w line width, h text height)
Top Overlay:
  lines w0.1: 13.975,-11.725 13.975,-9.025 ; 15.2,-8.975 15.2,-11.8 12.65,-11.8 12.65,-8.975 12.625,-8.95 15.225,-8.95 ; 16.137,-13.7 16.137,-11.7 ; 28.912,-8.4 28.912,-6.8
  lines w0.254: 34.419,-3.133 cw(c37.375,-6.088) 40.331,-3.133 ; 34.494,-10.294 ccw(c37.45,-7.338) 40.406,-10.294 ; 35.109,-3.822 cw(c37.375,-6.088) 39.641,-3.822 ; 35.184,-9.604 ccw(c37.45,-7.338) 39.716,-9.604 ; 35.733,-4.447 cw(c37.375,-6.088) 39.016,-4.447 ; 35.808,-8.98 ccw(c37.45,-7.338) 39.091,-8.98
  text "Silkscreen : Black" at 10.225,20.5 h1.52
  text "TX2" at 18.8,10.075 h0.6
  text "TX1" at 24.75,10.075 h0.6
  text "GND" at 23.1,8.075 h0.6 r90
  text "GND" at 23.1,4.475 h0.6 r90
  text "TX1" at 25.375,3.1 h0.6 r90
  text "TX2" at 20.725,3.05 h0.6 r90
  text "RST" at 30.2,-6.25 h1
  text "GPIO" at 29.137,-7.9 h0.8
  text "1 / 0" at 28.2,-8.4 h0.6
  text "NFC" at 38.425,-9.063 h1.52 r90
  text "HSU / I2C" at 15.05,-11.525 h0.8 r90
  text "GPI1" at 13.25,-13.3 h0.8
  text "0 / 1" at 16.337,-13.625 h0.6
  text "Ultimaker" at 9.675,-14.1 h3 r90
  text "ID" at 28.5,-19.8 h0.8
  text "RFID PCB Antenna" at 14.725,-28.025 h1
  text "1726-A" at 13.55,-30.05 h1.52
  text "DJV" at 21.325,-31.45 h1
Bottom Overlay:
  text "R" at 35.05,-20.425 h40
Top Solder:
  text "Soldermask: White" at 10.225,17.975 h1.52
Mechanical 1:
  lines w0.013: 0.25,-0.048 0.25,-9.112 ccw(c22.85,-9.112) 45.45,-9.112 45.45,-0.048 ; 0.25,-0.048 cw(c22.85,-9.112) 45.45,-0.048 ; 12.821,6.766 32.887,6.766 ; 12.85,6.763 12.85,-23.237 16.9,-23.237 ; 28.8,-23.237 32.85,-23.237 32.85,6.763 ; 0,-14.112 0,0 cw(c22.85,-9.112) 45.7,0 45.7,-14.112 45.146,-14.112 cw(c22.85,-9.112) 0.554,-14.112 0,-14.112 ; 4.5,-9.112 ccw(c22.85,-9.112) 41.2,-9.112 41.2,-0.91 ccw(c22.85,-9.112) 4.5,-0.91 4.5,-9.112 ; 16.9,-25.737 28.8,-25.737 28.8,-20.737 16.9,-20.737 16.9,-25.737 ; 17.4,-25.237 28.3,-25.237 28.3,-21.237 17.4,-21.237 17.4,-25.237
  text "PCB Thickness total 1.6 mm / Material : FR4" at 10.4,22.85 h1.52
Board Outline:
  the board outline again, w0.013